# Altium PCB Telemetry_Board.PcbDoc (part 2 of 2)
Units mm, origin at the board's own origin, x right, y up, seen from the top; angles counter-clockwise.
Board outline 50 x 50 mm, 4 copper layers (Top Layer, GND, Power, Bottom Layer), stack 0.603 mm thick; 96 components, 71 nets, 412 pads, 373 vias.
Unrouted connection lines stored in the file: 10.
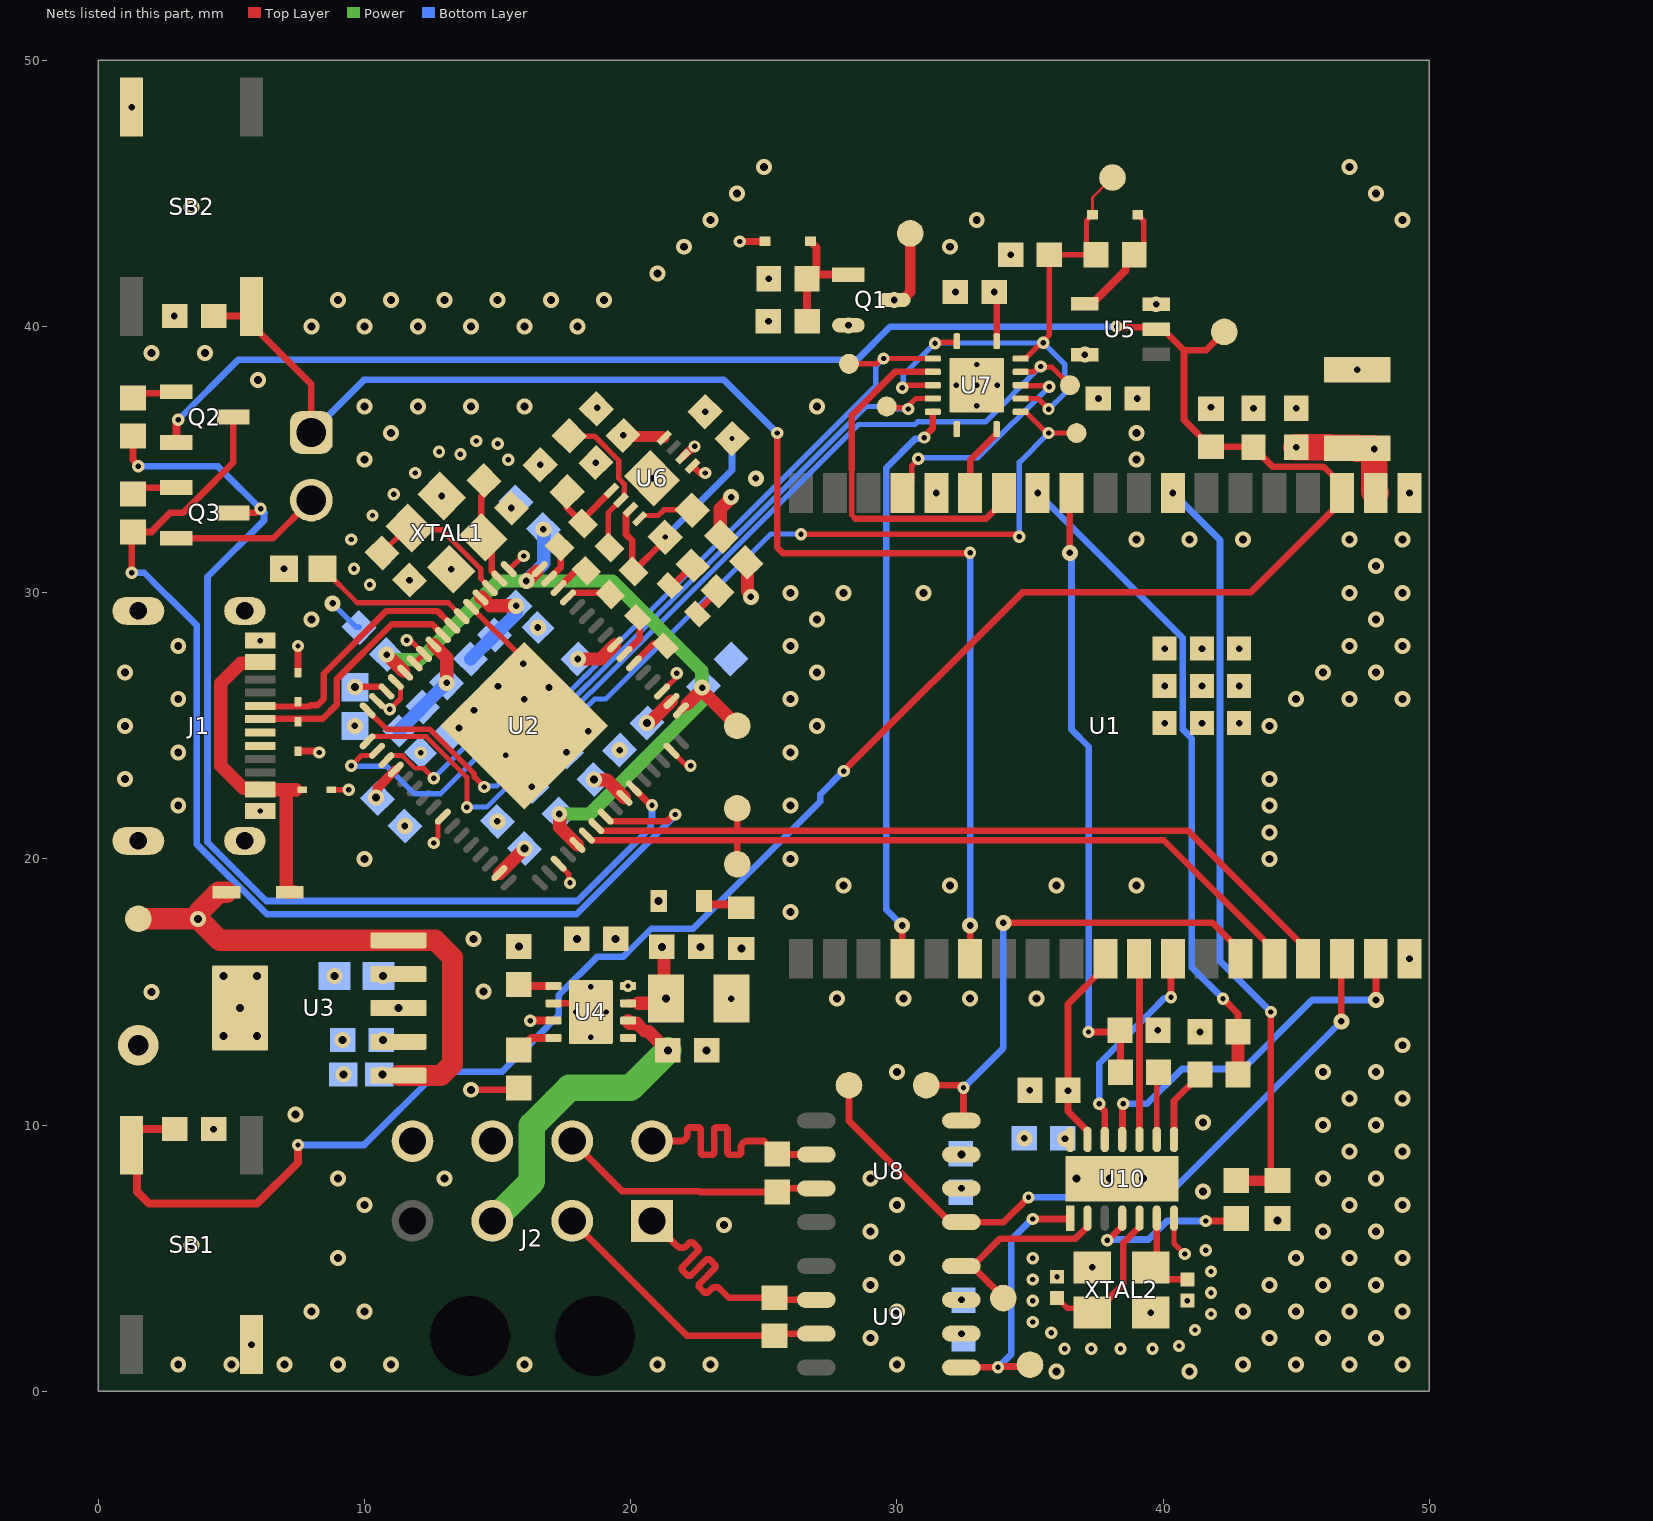
[diagram p4: the nets of this part, all layers, seen from the top]

## Via types
v1: diameter 0.6, hole 0.3, Top Layer to Bottom Layer, tented top, 146 vias
v2: diameter 0.6, hole 0.25, Top Layer to Bottom Layer, 90 vias
v3: diameter 0.46, hole 0.2, Top Layer to Bottom Layer, 88 vias
v4: diameter 0.6, hole 0.3, Top Layer to Bottom Layer, 38 vias
v5: diameter 0.5, hole 0.2, Top Layer to Bottom Layer, 11 vias

## Nets (pads, with @x,y where several pads share a name; then routed paths per layer and width w, separated by ;. In a path a pad name is that pad's centre, name@x,y a point inside that pad or via, vN(x,y) a via of type N, cw(c..) or ccw(c..) an arc to the next point about the centre after c; other vN are vias at no path point)
1V8: C10.1 C11.1 C12.1 C21.1 pad.TP2 U2.12 U2.37 U2.49 U2.64 | length 31.1
  Top Layer w0.322: U2.49@21.887,25.583 U2.49@22.122,25.819
  Top Layer w0.4: U2.12@11.452,27.06 11.515,26.998 U2.12@11.528,26.998
  Top Layer w0.5: v2(10.828,27.672) 10.841,27.672 U2.12@11.452,27.06 ; v2(16.076,30.442) 16.103,30.442 U2.64@16.477,30.816 ; v2(17.314,21.686) 17.333,21.667 17.333,21.192 U2.37@17.998,20.528 ; U2.49@22.122,25.819 v2@22.665,26.362 ; v2(22.684,26.434) 22.703,26.415 22.703,26.297 pad.TP2@24,25
  Power w0.5: v2(10.828,27.672) 10.855,27.672 11.044,27.483 12.067,27.483 15.026,30.442 v2(16.076,30.442) 19.303,30.442 22.672,27.073 22.672,26.446 v2(22.684,26.434) 22.665,26.415 22.665,25.9 18.451,21.686 v2(17.314,21.686)
  Bottom Layer w0.5: v2(16.076,30.442) 16.73,31.096 16.73,32.37 v2(16.714,32.386)
3V3: C1.1 C2.1 C6.1 C7.1 C8.1 C9.1 C13.1 C20.1 C24.1 C25.1 C29.1 C32.1 C33.1 C34.1 FB1.1 FB2.1 Q1.2 R1.2 R6.1 R7.1 R9.2 R10.2 R15.2 R16.2 R17.2 R21.2 R22.2 R23.2 R24.2 R28.2 U1.2 U2.20 U2.31 U2.42 U2.50 U2.56 U4.7 U6.6 U6.8 U8.3 U9.3 U10.14 | length 20.4
  Top Layer w0.3: U6.6@21.968,35.114 22.334,35.481 22.381,35.481 v3(22.4,35.5)
  Top Layer w0.332: U4.7@19.9,14.575 20.288,14.575
  Top Layer w0.35: v4(10.434,22.316) 10.482,22.364 10.482,22.664 U2.20@11.174,23.356 ; U2.31@15.063,19.467 U2.31@15.079,19.467 ; v4@15.998,20.386 v4(16.014,20.386)
  Top Layer w0.4: v2(19.714,35.914) 19.73,35.93 20.022,35.93 20.078,35.874 21.209,35.874 U6.8@21.261,35.821
  Top Layer w0.5: U2.31@15.079,19.467 v4@15.998,20.386 ; v2(18.014,27.514) 18.868,27.514 U2.56@19.412,28.058 ; v4(18.614,22.986) 18.633,22.967 19.094,22.967 U2.42@19.765,22.295 ; 20.288,14.575 21.153,14.575 v4(21.328,14.75) 21.25,14.827 21.25,16.623 v4(21.173,16.7) ; v4(20.614,25.114) 20.633,25.133 20.729,25.133 U2.50@21.533,25.937 ; R9.2@23.406,32.106 23.363,32.148 23.363,33.155 23.773,33.564 v2(23.773,33.591) ; R10.2@24.341,31.141 24.383,31.099 24.383,30.054 24.511,29.926 v2(24.511,29.845)
  Top Layer w0.99: v2(45,35.473) C1.1@46.229,35.473
  Top Layer w1: C1.1@46.229,35.473 46.27,35.473 46.298,35.444 47.278,35.444 C1.1@47.3,35.422 47.918,35.422 v2(47.94,35.4) 47.94,33.8 U1.2@47.99,33.75
  other v2: 32.425,3.435 36.313,9.483 34.997,11.305 41.385,13.5 39.806,13.564 9.636,25 16.507,28.693 16.594,34.806 22.794,36.806 18.748,36.948 41.8,36.975 28.18,40.05 25.173,40.2
  other v3: 12.107,23.993
  other v4: 44.3,6.425 32.425,8.894 24.153,16.635 15.8,16.715
3V3_D: C26.1 C28.1 pad.@30.5,43.5 Q1.3 U5.5 U7.14 | length 4.8
  Top Layer w0.25: v2(33.654,41.3) 33.75,41.204 U7.14@33.75,39.45
  Top Layer w0.381: v2(29.9,41) 30.201,41 30.5,41.299 pad.@30.5,43.5
  other v2: 37.573,37.3 37.06,38.947
\ESP_EN: C27.1 D8.1 pad.@38.1,45.6 R11.1 U7.1 U7.4 U7.10 U7.13 | length 22.4
  Top Layer w0.108: D8.1@37.324,44.2 D8.1@37.349,44.2 37.349,44.661 37.349,44.849 pad.@38.1,45.6
  Top Layer w0.159: D8.1@37.303,44.179 D8.1@37.324,44.2
  Top Layer w0.2: v3(30.2,37.7) 30.27,37.7 30.37,37.8 U7.4@31.35,37.8 ; v3(31.432,39.378) 31.468,39.414 32.23,39.414 32.25,39.434 U7.1@32.25,39.45 ; U7.10@34.65,37.3 35.3,37.3 v3(35.7,36.9) ; U7.13@34.65,38.8 34.67,38.82 34.85,38.82 35.371,39.341 35.45,39.341 v3(35.5,39.391) ; v3@35.5,39.4 35.5,39.461 35.727,39.688 C27.1@35.727,42.7 R11.1@37.485,42.7 37.121,43.064 37.121,43.971 37.246,44.097 37.246,44.122 D8.1@37.303,44.179
  Bottom Layer w0.2: v3(30.2,37.7) 30.243,37.743 30.243,38.189 v3(31.432,39.378) ; v3@31.427,39.374 31.438,39.385 35.485,39.385 35.5,39.4 v3(35.5,39.391) 36.311,38.58 36.311,37.495 35.716,36.9 v3(35.7,36.9)
CAN1_H: J2.6 R19.2 U8.7 | length 10
  Top Layer w0.25: J2.6@17.8,9.4 19.69,7.51 19.88,7.51 21.72,7.51 22.583,7.51 22.608,7.485 R19.2@25.5,7.485 25.64,7.624 U8.7@26.975,7.624
CAN1_L: J2.5 R19.1 U8.6 | length 10
  Top Layer w0.25: J2.5@20.8,9.4 21.75,9.4 21.875,9.4 ccw(c21.875,9.65) 22.125,9.65 22.125,9.832 cw(c22.201,9.832) 22.201,9.908 22.553,9.908 cw(c22.553,9.832) 22.629,9.832 22.629,8.968 ccw(c22.705,8.968) 22.705,8.892 23.057,8.892 ccw(c23.057,8.968) 23.133,8.968 23.133,9.832 cw(c23.209,9.832) 23.209,9.908 23.561,9.908 cw(c23.561,9.832) 23.637,9.832 23.637,8.968 ccw(c23.713,8.968) 23.713,8.892 24.065,8.892 ccw(c24.065,8.968) 24.141,8.968 24.141,9.15 cw(c24.391,9.15) 24.391,9.4 25.002,9.4 25.075,9.327 25.097,9.304 25.486,8.915 R19.1@25.5,8.915 25.521,8.894 U8.6@26.975,8.894
CAN2_H: J2.2 R20.2 U9.7 | length 11
  Top Layer w0.25: J2.2@17.8,6.4 22.115,2.085 R20.2@25.4,2.085 25.48,2.165 U9.7@26.975,2.165
CAN2_L: J2.1 R20.1 U9.6 | length 10.9
  Top Layer w0.25: J2.1@20.8,6.4 21.65,5.55 21.738,5.462 ccw(c21.915,5.638) 22.092,5.462 22.195,5.564 cw(c22.274,5.485) 22.354,5.564 22.513,5.405 cw(c22.433,5.326) 22.513,5.246 21.954,4.687 ccw(c22.033,4.607) 21.954,4.528 22.113,4.369 ccw(c22.192,4.448) 22.272,4.369 22.831,4.928 cw(c22.911,4.849) 22.99,4.928 23.149,4.769 cw(c23.07,4.689) 23.149,4.61 22.59,4.051 ccw(c22.67,3.971) 22.59,3.891 22.749,3.732 ccw(c22.829,3.812) 22.908,3.732 23.011,3.835 cw(c23.188,3.659) 23.365,3.835 23.685,3.515 24.015,3.515 24.915,3.515 R20.1@25.4,3.515 25.48,3.435 U9.6@26.975,3.435
EE_CS: R12.1 R15.1 U6.1 | length 3.1
  Top Layer w0.25: R15.1@17.606,33.794 17.596,33.785 17.596,33.3 17.606,33.291 17.606,33.194 R12.1@18.2,32.6 18.2,32.761 U6.1@19.279,33.839
EE_DATA: R14.1 R17.1 R18.1 U6.3 | length 9
  Top Layer w0.25: U6.3@19.986,33.132 19.824,32.97 19.824,32.742 19.824,32.565 19.824,32.194 20.055,31.963 20.055,30.845 R14.1@20.1,30.8 21.294,31.994 v3(21.294,32.094)
  Bottom Layer w0.25: v3(21.294,32.094) 23.806,34.606 v3(23.806,35.794)
EE_SCK: R13.1 R16.1 U6.2 | length 5.9
  Top Layer w0.2: R16.1@17.694,35.894 17.704,35.885 18.632,35.885 19.55,34.966 19.55,34.292 19.769,34.074 19.769,33.886 19.757,33.875 19.757,33.611 U6.2@19.632,33.486 19.155,33.009 19.155,31.745 R13.1@19.2,31.7
ESP_EN: C3.1 C4.1 pad.@42.3,39.8 Q2.2 R1.1 SB1.2 U1.3 U5.2 | length 113.5
  Top Layer w0.25: v3(28,23.3) 34.715,30.015 43.285,30.015 46.72,33.45 46.72,33.6 U1.3@46.72,33.75 46.72,34.05 46.053,34.717 45.997,34.717 45.992,34.722 45.951,34.722 45.934,34.739 44.111,34.739 43.4,35.45 C3.1@43.4,35.473 43.388,35.485 R1.1@41.8,35.485 41.786,35.485 40.787,36.484 40.787,39.114 ; v3(38.25,40) 38.269,39.981 39.659,39.981 U5.2@39.74,39.9 40,39.9 40.787,39.114 ; pad.@42.3,39.8 41.614,39.114 40.787,39.114
  Top Layer w0.3: C4.1@2.873,9.85 1.632,9.85 1.45,9.668 1.45,7.5 1.9,7.05 5.962,7.05 7.5,8.588 v3(7.5,9.25) ; Q2.2@2.933,35.65 2.933,36.406 3,36.473 v3(3,36.5)
  Bottom Layer w0.25: v3(3,36.5) 5.25,38.75 28.5,38.75 29.75,40 v3(38.25,40) ; v3(7.5,9.25) 9.984,9.25 12.741,12.007 13.719,12.007 14.281,12.007 15.168,12.007 16.477,13.316 17.296,14.135 17.296,14.511 17.296,14.886 17.871,15.461 18.239,15.829 18.731,16.321 19.15,16.321 19.713,16.321 20.111,16.719 20.771,17.379 20.892,17.379 21.454,17.379 22.339,17.379 26.281,21.321 26.679,21.719 27.121,22.16 27.121,22.421 v3(28,23.3)
ESP_IO0_B: BOOT.2 Q3.2 | length 5.7
  Top Layer w0.25: Q3.2@2.933,32.05 6.57,32.05 BOOT.2@8,33.48
EXT_3V3: C22.1 J2.3 U4.6 | length 12.5
  Top Layer w0.461: 20.284,13.764 20.519,13.529 20.655,13.529 20.675,13.509
  Top Layer w0.5: U4.6@19.9,13.925 19.9,13.875 19.95,13.825 20.223,13.825 20.284,13.764 ; 20.675,13.509 21.375,12.809 v4(21.398,12.809)
  Power w1: J2.3@14.8,6.4 16.285,7.885 16.285,8.785 16.285,9.985 17.185,10.885 17.697,11.397 19.986,11.397 v4(21.398,12.809)
FTDI_DTR: Q3.3 R3.2 U2.43 | length 41.6
  Top Layer w0.25: R3.2@1.3,35.885 1.3,34.991 1.5,34.791 v3(1.5,34.75) ; Q3.3@5.067,33 5.915,33 6.07,33.155 v3(6.095,33.155) ; U2.43@20.119,22.649 20.747,22.02 v3(20.8,22.02)
  Bottom Layer w0.25: v3(1.5,34.75) 4.5,34.75 6.25,33 6.221,32.971 6.221,32.721 4.1,30.6 4.1,29.8 4.1,29 4.1,21.332 4.1,20.628 4.898,19.83 6.307,18.421 17.99,18.421 18.329,18.76 20.75,21.181 20.75,21.413 20.8,21.463 v3(20.8,22.02)
FTDI_RTS: Q2.3 R4.2 U2.40 | length 43.1
  Top Layer w0.25: v3(1.25,30.75) 1.25,32.235 R4.2@1.3,32.285 1.999,32.285 2.11,32.395 2.11,32.418 2.235,32.543 2.692,33 3.175,33 3.631,33.457 3.757,33.582 5.067,34.892 Q2.3@5.067,36.6 ; U2.40@19.058,21.588 19.235,21.411 21.362,21.411 21.617,21.667 v3(21.674,21.667)
  Bottom Layer w0.25: v3(1.25,30.75) 1.722,30.75 2.302,30.17 2.8,29.672 3.7,28.772 3.7,20.549 6.329,17.919 7.839,17.919 17.968,17.919 21.674,21.626 v3(21.674,21.667)
FTDI_TCK: pad.@36.5,37.8 U2.16 U7.12 | length 35.3
  Top Layer w0.2: U2.16@10.113,25.583 10.822,24.875 12.438,24.875 14.126,23.188 14.126,23.074 v3(14.5,22.7) ; U7.12@34.65,38.3 35.139,38.3 35.339,38.5 v3(35.4,38.5) 35.419,38.481 35.819,38.481 pad.@36.5,37.8
  Bottom Layer w0.2: v3(14.5,22.7) 14.538,22.738 14.968,22.738 18.512,26.282 18.524,26.282 28.561,36.319 30.673,36.319 30.775,36.421 33.321,36.421 v3(35.4,38.5)
FTDI_TDI: pad.@36.75,36 U2.17 U7.9 | length 37.4
  Top Layer w0.185: U2.17@10.113,24.417 10.29,24.593 12.322,24.593 13.844,23.071 v3(13.844,21.946)
  Top Layer w0.2: v3(26.4,32.2) 34.446,32.2 34.546,32.1 v3(34.6,32.1) ; U7.9@34.65,36.8 34.83,36.8 35.592,36.038 35.662,36.038 v3(35.7,36) 36.5,36 pad.@36.75,36
  Bottom Layer w0.185: v3(13.844,21.946) 14.584,21.946 18.639,26.001 19.05,26.001 25.249,32.2 v3(26.4,32.2)
  Bottom Layer w0.2: v3(34.6,32.1) 34.6,34.9 v3(35.7,36)
FTDI_TDO: pad.@29.617,37 U2.18 U7.5 | length 30.6
  Top Layer w0.2: v3(9.5,23.5) 9.884,23.884 10.288,23.884 U2.18@10.467,24.063 ; pad.@29.617,37 29.665,36.951 30.382,36.951 v3(30.431,36.903) ; v3@30.404,36.995 30.709,37.3 U7.5@31.35,37.3
  Bottom Layer w0.2: v3(9.5,23.5) 9.513,23.487 10.823,23.487 11.835,22.474 11.865,22.444 12.842,22.444 15.368,24.97 16.362,24.97 16.738,25.347 17.168,25.347 18.392,26.571 18.405,26.571 28.833,37 29.912,37 30.009,36.903 v3(30.431,36.903)
FTDI_TMS: pad.@28.2,38.6 U2.19 U7.2 | length 29.3
  Top Layer w0.162: 11.454,23.847 11.892,23.409 12.22,23.409
  Top Layer w0.2: U2.19@10.82,23.71 10.997,23.886 11.414,23.886 11.454,23.847 ; 12.22,23.409 v3(12.6,23.028) ; pad.@28.2,38.6 29.23,38.6 29.43,38.8 v3(29.5,38.8) 31.15,38.8 U7.2@31.35,38.8
  Bottom Layer w0.2: v3(12.6,23.028) 12.6,23.044 14.816,25.259 16.242,25.259 16.619,25.636 17.048,25.636 18.272,26.86 18.285,26.86 18.668,27.243 29.2,37.775 29.2,38.5 v3(29.5,38.8)
GND: C1.2 C2.2 C3.2 C4.2 C5.2 C6.2 C7.2 C8.2 C9.2 C10.2 C11.2 C12.2 C14.2 C15.2 C16.2 C17.2 C18.2 C19.2 C20.2 C21.2 C22.2 C23.2 C24.2 C25.2 C26.2 C27.2 C28.2 C29.2 C30.2 C31.2 C32.2 C33.2 C34.2 C35.2 C36.2 C37.2 D2.1 D3.1 D4.1 D5.2 D6.1 J1.A1_B12 J1.B1_A12 J1.SH1 J1.SH2 J1.SH3 J1.SH4 J2.7 J2.8 pad.3 R2.1 R5.2 R8.1 SB1.3 SB2.3 U1.1 U1.15 U1.38 U1.39 U2.1 U2.5 U2.10 U2.11 U2.13 U2.15 U2.25 U2.35 U2.47 U2.51 U2.65 U3.3 U3.6 U4.2 U4.5 U4.9 U5.3 U6.5 U6.9 U7.7 U7.15 U8.2 U9.2 U10.7 U10.15 XTAL1.2 XTAL1.4 XTAL2.2 XTAL2.4 | length 20.7
  Top Layer w0.089: D2.1@7.5,26.992 D2.1@7.5,27.089 ; D4.1@8.746,22.6 D4.1@8.817,22.6
  Top Layer w0.108: D5.2@24.978,43.2 D5.2@25.049,43.2
  Top Layer w0.185: v3(12.6,20.6) 12.6,20.658 12.765,20.823 12.765,21.411 U2.25@12.942,21.588
  Top Layer w0.2: D4.1@8.818,22.6 v3(9.402,22.6) ; U2.15@10.467,25.937 10.48,25.937 10.754,25.663 10.912,25.663 v3(10.95,25.625) 10.952,25.625 11.351,26.023 11.351,26.467 U2.13@11.174,26.644 ; v3(11.583,28.217) 11.633,28.167 11.772,28.167 U2.10@12.235,27.705 U2.11@11.881,27.351 ; U2.5@14.002,29.472 15.966,27.509 v2(15.966,27.334) ; U2.1@15.417,30.887 15.449,30.887 15.947,31.384 v3(15.98,31.384) ; U2.35@17.29,19.82 17.29,19.807 17.666,19.431 17.666,19.149 v3(17.716,19.099) ; U2.51@21.18,26.29 21.679,26.79 21.679,26.929 v3(21.729,26.979) ; U2.47@21.533,24.063 22.058,23.538 22.212,23.538 v3(22.25,23.5) ; U10.7@40.413,6.505 40.413,5.555 v3(40.813,5.155)
  Top Layer w0.25: D3.1@7.5,24.054 8.206,24.054 8.259,24 v3(8.3,24) ; D2.1@7.5,27.089 v3(7.5,28) ; v1(14,11.328) 15.74,11.328 R5.2@15.8,11.387 ; U4.2@17.1,14.575 17.8,14.575 17.925,14.45 v5(17.925,14.25) ; U6.5@22.326,34.765 22.594,34.497 v3(22.803,34.497) ; v3(24.1,43.2) D5.2@24.978,43.2
  Bottom Layer w0.2: v2(8.8,29.6) 9.7,28.7 C10.2@9.8,28.7
  other v1: 36,0.75 41,0.75 3,1 5,1 7,1 9,1 11,1 16,1 21,1 23,1 30,1 43,1 45,1 47,1 49,1 29,2 44,2 46,2 48,2 8,3 10,3 30,3 43,3 45,3 47,3 49,3 29,4 44,4 46,4 48,4 9,5 30,5 45,5 47,5 49,5 3.5,5.5 29,6 46,6 48,6 23.5,6.25 10,7 30,7 47,7 49,7 41.5,7.5 9,8 13,8 29,8 36.75,8 38,8 39.25,8 46,8 48,8 47,9 49,9 46,10 48,10 41.5,10.1 47,11 49,11 30,12 46,12 48,12 49,13 27.75,14.75 30.25,14.75 32.75,14.75 35.25,14.75 2,15 14.1,17 26,18 28,19 32,19 36,19 39,19 10,20 26,20 44,21 3,22 26,22 1,23 44,23 3,24 26,24 1,25 27,25 44,25 3,26 26,26 45,26 47,26 49,26 1,27 27,27 46,27 48,27 3,28 26,28 47,28 49,28 8,29 27,29 48,29 26,30 28,30 31,30 47,30 49,30 48,31 39,32 41,32 43,32 47,32 49,32 10,35 39,35 11,36 39,36 14,37 27,37 6,38 2,39 4,39 8,40 10,40 12,40 14,40 16,40 18,40 9,41 11,41 13,41 15,41 17,41 19,41 21,42 22,43 32,43 23,44 33,44 49,44 24,45 48,45 25,46 47,46
  other v2: 5.75,1.754 32.425,2.165 39.538,2.955 37.338,4.655 32.425,7.624 34.786,9.505 4.327,9.85 23.779,14.75 49.26,16.25 11.514,21.236 14.986,21.414 16.286,22.714 17.586,24.014 19.586,24.086 18.4,24.8 13.549,24.917 40.06,25.1 41.46,25.1 42.86,25.1 14.114,25.586 16,26 16.928,26.441 15.014,26.486 40.06,26.5 41.46,26.5 42.86,26.5 40.06,27.9 41.46,27.9 42.86,27.9 11.69,30.474 13.258,30.879 6.974,30.9 15.514,33.186 12.904,33.637 31.48,33.75 49.26,33.75 20.8,34.3 24.7,34.3 18.686,34.886 43.4,36.927 45,36.927 39.027,37.3 47.3,38.378 2.848,40.4 39.74,40.84 32.2,41.3 25.185,41.8 34.273,42.7 1.25,48.246
  other v3: 36.3,1.6 37.3,1.6 38.4,1.6 39.6,1.6 40.6,1.7 35.8,2.2 41.2,2.3 35.1,2.6 41.8,2.9 35.1,3.4 40.913,3.405 41.8,3.7 35.1,4.2 36.013,4.305 41.8,4.5 35.1,5 41.6,5.3 15.3,23.9 10.2,30.3 9.6,30.9 9.5,32 10.3,32.9 11.1,33.7 11.9,34.5 15.4,35 13.6,35.2 12.8,35.3 15,35.6 14.2,35.7
  other v4: 7.4,10.4 9.2,11.9 22.852,12.809 9.173,13.2 4.7,13.35 5.95,13.35 5.325,14.4 11.275,14.4 14.475,15.025 4.7,15.6 5.95,15.6 8.874,15.6 22.627,16.7 17.978,17 21.049,18.421 44,20 44,22 10,37 12,37 16,37 3.5,44.5
  other v5: 18.5,13.3 19.075,14.25 18.5,15.2 6.075,21.8 6.075,28.2 33,37.025 32.225,37.8 33,37.8 33.775,37.8 33,38.575
NetC5_1: BOOT.1 C5.1 SB2.2 U1.25 | length 53.2
  Top Layer w0.25: C5.1@4.327,40.4 5.543,40.4 SB2.2@5.75,40.607 ; SB2.2@5.75,40.753 SB2.2@5.75,40.607 ; BOOT.1@8,36.02 8,37.83 5.75,40.08 SB2.2@5.75,40.607 ; v3(25.5,36) 25.5,31.711 25.733,31.478 32.728,31.478 v3(32.75,31.5) ; U1.25@32.75,16.25 v2(32.75,17.5)
  Bottom Layer w0.25: BOOT.1@8,36.02 9.98,38 23.5,38 v3(25.5,36) ; v2(32.75,17.5) v3(32.75,31.5)
NetC13_2: C13.2 D5.1 Q1.1 R2.2 | length 4.7
  Top Layer w0.3: C13.2@26.627,40.2 26.627,41.788 R2.2@26.615,41.8 R2.2@26.765,41.95 ; D5.1@26.751,43.2 26.776,43.2 26.854,43.122 26.854,43.097 26.98,42.971 26.98,42.164 R2.2@26.765,41.95 ; Q1.1@28.18,41.95 R2.2@26.765,41.95
NetC15_1: C15.1 U3.4
  other v4: 10.7,15.6
NetC16_1: C16.1 C18.1 FB1.2 U2.9 | length 4.2
  Top Layer w0.5: U2.9@12.588,28.058 13.086,27.561 v2(13.086,26.614)
  Bottom Layer w0.5: FB1.2@11.293,24.807 11.293,24.814 12.186,25.707 C16.1@12.186,25.714 v2(13.086,26.614)
NetC17_1: C17.1 C19.1 FB2.2 U2.4 | length 4.2
  Top Layer w0.5: U2.4@14.356,29.826 14.407,29.826 14.726,29.507 v2(15.693,29.507)
  Bottom Layer w0.5: C17.1@13.986,27.514 C19.1@14.886,28.414 15.709,29.237 15.709,29.491 v2(15.693,29.507)
NetC30_1: C30.1 U2.2 XTAL1.1 | length 4
  Top Layer w0.25: XTAL1.1@14.46,32.081 14.389,32.152 14.389,33.617 14.502,33.73 14.502,34.198 C30.1@14.486,34.214 ; XTAL1.1@14.714,32.208 14.785,32.138 14.785,30.812 U2.2@15.063,30.533
NetC31_1: C31.1 U2.3 XTAL1.3 | length 5.6
  Top Layer w0.2: C31.1@10.662,31.502 11.595,32.435 XTAL1.3@11.702,32.435 11.773,32.364 12.899,32.364 14.366,30.897 14.366,30.537 14.71,30.193 U2.3@14.71,30.18
NetC35_1: C35.1 U10.5 XTAL2.3 | length 5.9
  Top Layer w0.2: C35.1@36.013,3.505 36.404,3.114 37.179,3.114 XTAL2.3@37.338,2.955
  Top Layer w0.25: XTAL2.3@37.338,2.955 37.438,2.955 38.507,4.024 38.507,5.577 39.113,6.183 U10.5@39.113,6.505
NetC36_1: C36.1 U10.6 XTAL2.1 | length 3.5
  Top Layer w0.25: U10.6@39.763,6.505 39.763,4.88 XTAL2.1@39.538,4.655 39.988,4.205 C36.1@40.913,4.205
NetD6_2: D6.2 R28.1 | length 1.5
  Top Layer w0.3: D6.2@22.751,18.421 22.879,18.293 24.025,18.293 R28.1@24.153,18.165
NetD7_2: D7.2 R10.1 | length 1.2
  Top Layer w0.25: D7.2@22.502,29.202 22.502,29.302 R10.1@23.259,30.059
NetD8_2: D8.2 R11.2 U5.4 | length 4.5
  Top Layer w0.108: D8.2@39.051,44.2 D8.2@39.076,44.2
  Top Layer w0.159: D8.2@39.076,44.2 D8.2@39.097,44.179
  Top Layer w0.2: R11.2@38.915,42.7 39.28,43.064 39.28,43.971 39.154,44.097 39.154,44.122 D8.2@39.097,44.179
  Top Layer w0.3: U5.4@37.06,40.852 37.321,40.852 38.598,42.13 38.598,42.382 R11.2@38.915,42.7
NetD9_2: D9.2 R9.1 | length 1.2
  Top Layer w0.25: D9.2@21.467,30.267 21.567,30.267 R9.1@22.324,31.024
NetQ2_1: Q2.1 R3.1 | length 1.6
  Top Layer w0.25: R3.1@1.4,37.215 1.685,37.5 Q2.1@2.9,37.5
NetQ3_1: Q3.1 R4.1 | length 1.9
  Top Layer w0.25: R4.1@1.2,33.615 R4.1@1.3,33.715 1.535,33.95 Q3.1@2.933,33.95
NetR5_1: R5.1 U4.4 | length 1.5
  Top Layer w0.3: R5.1@15.8,12.818 15.814,12.818 16.27,13.275 U4.4@17.1,13.275
NetR6_2: R6.2 U4.1 | length 1.3
  Top Layer w0.3: R6.2@15.8,15.285 15.86,15.225 U4.1@17.1,15.225
NetR7_2: R7.2 U2.14 | length 1.3
  Top Layer w0.25: v4(9.636,26.451) 9.652,26.467 10.644,26.467 U2.14@10.82,26.29
NetR8_2: R8.2 U2.6 | length 6
  Top Layer w0.2: R8.2@8.426,30.9 8.45,30.9 9.726,29.624 13.144,29.624 U2.6@13.649,29.119
NetR12_2: R12.2 U2.63 | length 1.4
  Top Layer w0.25: U2.63@16.937,30.533 17.375,30.971 17.375,31.685 R12.2@17.33,31.73
NetR13_2: R13.2 U2.62 | length 1.3
  Top Layer w0.25: U2.62@17.29,30.18 17.964,30.853 18.307,30.853 R13.2@18.33,30.83
NetR14_2: R14.2 U2.61 | length 1.7
  Top Layer w0.25: U2.61@17.644,29.826 17.821,30.003 18.814,30.003 18.887,29.93 R14.2@19.23,29.93
NetR18_2: R18.2 U6.4 | length 2.1
  Top Layer w0.2: U6.4@20.339,32.779 20.464,32.904 21.032,32.904 21.244,33.115 22.296,33.115 R18.2@22.306,33.106
NetR21_1: R21.1 R26.1 U1.12 | length 25
  Top Layer w0.25: v3(42.25,14.75) 42.815,14.185 R21.1@42.815,13.5
  Top Layer w0.5: R26.1@42.815,11.9 R21.1@42.815,13.5
  Bottom Layer w0.25: v2(35.29,33.75) 40.739,28.301 40.739,24.861 40.781,24.819 41.079,24.521 41.079,15.921 v3(42.25,14.75)
NetR22_1: R22.1 R27.1 U1.8 | length 29
  Top Layer w0.25: v3(44.05,14.25) 44.05,8.165 R22.1@44.3,7.915
  Top Layer w0.4: R27.1@42.697,7.92 R27.1@42.713,7.905 ; R27.1@42.75,7.915 R22.1@44.3,7.915
  Bottom Layer w0.25: v2(40.37,33.75) 42.139,31.981 42.139,28.181 42.139,27.619 42.139,26.781 42.139,26.219 42.139,25.381 42.139,24.819 42.139,16.161 v3(44.05,14.25)
NetR23_1: R23.1 U1.29 U10.13 | length 7.7
  Top Layer w0.25: U10.13@37.163,9.461 37.163,9.783 36.428,10.517 v2(36.428,11.291) R23.1@36.428,11.305 36.428,14.548 37.83,15.95 U1.29@37.83,16.25
NetR24_1: R24.1 R25.1 U1.11 | length 23.3
  Top Layer w0.25: v2(36.5,31.5) 36.5,33.69 U1.11@36.56,33.75 ; v3(37.2,13.5) 38.362,13.5 38.401,13.538 R25.1@38.401,11.989
  Bottom Layer w0.25: v2(36.5,31.5) 36.56,31.44 36.56,24.86 37.205,24.215 37.205,13.505 v3(37.2,13.5)
NetR25_2: R25.2 U10.9 | length 2.6
  Top Layer w0.2: U10.9@39.763,9.461 39.763,11.92 R25.2@39.831,11.989
NetR26_2: R26.2 U10.8 | length 2.8
  Top Layer w0.25: U10.8@40.413,9.461 40.413,10.915 41.385,11.886 R26.2@41.385,11.9
NetR27_2: R27.2 U10.4 | length 6.3
  Top Layer w0.25: v3(37.906,5.678) 37.941,5.678 38.463,6.2 U10.4@38.463,6.505 ; v3(41.6,6.4) 42.665,6.4 R27.2@42.75,6.485
  Bottom Layer w0.25: v3(37.906,5.678) 37.928,5.7 39.45,5.7 40.15,6.4 v3(41.6,6.4)
NetU1_13: U1.13 U7.3 | length 13.8
  Top Layer w0.192: 28.305,34.617 28.305,32.923 28.442,32.786
  Top Layer w0.25: 28.305,34.617 28.305,36.103 28.305,36.666 29.948,38.309 30.452,38.309 30.559,38.309 30.568,38.3 U7.3@31.35,38.3 ; 28.442,32.786 33.289,32.786 33.356,32.786 34.02,33.45 U1.13@34.02,33.75
NetU1_14: U1.14 U7.8 | length 2.8
  Top Layer w0.25: U1.14@32.75,33.75 32.75,34.98 33.75,35.98 U7.8@33.75,36.15
NetU1_16: U1.16 U7.11 | length 8.7
  Top Layer w0.2: U1.16@30.21,33.75 30.56,34.1 30.56,34.781 30.8,35.021 v3(30.8,35.032) ; U7.11@34.65,37.8 34.67,37.78 35.684,37.78 v3(35.727,37.737)
  Bottom Layer w0.2: v3(30.8,35.032) 30.843,35.075 33.049,35.075 35.711,37.737 v3(35.727,37.737)
NetU1_23: U1.23 U7.6 | length 21.7
  Top Layer w0.25: v2(30.2,17.5) 30.2,16.26 U1.23@30.21,16.25 ; v3(31.03,35.83) 31.03,35.87 31.35,36.191 U7.6@31.35,36.8
  Bottom Layer w0.25: v2(30.2,17.5) 29.6,18.1 29.6,34.694 30.696,35.79 30.99,35.79 v3(31.03,35.83)
NetU1_30: U1.30 U10.10 | length 6.8
  Top Layer w0.25: U1.30@39.1,16.25 39.113,16.237 U10.10@39.113,9.461
NetU1_31: U1.31 U10.12 | length 8.2
  Top Layer w0.25: v3(37.6,10.8) 37.6,10.743 37.813,10.53 U10.12@37.813,9.461 ; v3(40.3,14.8) 40.3,16.18 U1.31@40.37,16.25
  Bottom Layer w0.25: v3(37.6,10.8) 37.6,12.318 39.127,13.845 39.525,14.243 40.053,14.771 40.271,14.771 v3(40.3,14.8)
NetU1_33: pad.@31.1,11.5 U1.33 U8.4 | length 19.7
  Top Layer w0.25: pad.@31.1,11.5 32.359,11.5 32.459,11.4 v3(32.5,11.4) 32.5,10.239 32.02,10.239 U8.4@31.933,10.326 ; v2(34,17.6) 41.86,17.6 42.91,16.55 U1.33@42.91,16.25 U1.33@42.9,16.24
  Bottom Layer w0.25: v3(32.5,11.4) 34,12.9 v2(34,17.6)
NetU1_34: pad.@24,19.8 U1.34 U2.38 | length 28.8
  Top Layer w0.25: U2.38@18.351,20.881 18.528,20.704 24,20.704 ; pad.@24,19.8 24,20.704 ; U1.34@44.18,16.25 44.18,16.55 40.026,20.704 24,20.704
NetU1_35: pad.@24,21.9 U1.35 U2.39 | length 29.8
  Top Layer w0.25: U2.39@18.705,21.235 18.881,21.058 24,21.058 ; pad.@24,21.9 24,21.058 ; U1.35@45.45,16.25 45.45,16.55 40.942,21.058 24,21.058
NetU1_36: pad.@28.2,11.5 U1.36 U8.1 | length 26.9
  Top Layer w0.25: pad.@28.2,11.5 28.2,10.154 32,6.354 34.013,6.354 v3(34.943,7.284) ; v2(46.7,13.9) 46.7,16.23 U1.36@46.72,16.25
  Bottom Layer w0.25: v3(34.943,7.284) 40.084,7.284 v2(46.7,13.9)
NetU1_37: U1.37 U10.11 | length 14
  Top Layer w0.25: U10.11@38.463,9.461 38.475,9.473 38.475,10.775 v3(38.5,10.8) ; U1.37@47.99,16.25 48,16.24 v2(48,14.7)
  Bottom Layer w0.25: v3(38.5,10.8) 39.395,10.8 40.706,12.11 43.011,12.11 45.6,14.7 v2(48,14.7)
RX_CAN: pad.TP4 U9.4 U10.2 | length 7.4
  Top Layer w0.25: U9.4@32.425,4.705 U9.4@32.823,4.705 ; pad.TP4@34,3.5 34,3.528 U9.4@32.823,4.705 ; U10.2@37.163,6.505 37.163,6.183 36.714,5.734 36.053,5.734 35.573,5.734 33.879,5.734 32.85,4.705 U9.4@32.823,4.705
RX_LED: D7.1 U2.54 | length 1.5
  Top Layer w0.25: U2.54@20.119,27.351 20.847,28.079 21.218,28.079 D7.1@21.298,27.998
TX_CAN: pad.TP5 U9.1 U10.1 | length 10.2
  Top Layer w0.25: U9.1@32.425,0.895 32.428,0.897 33.797,0.897 v3(33.8,0.9) 33.829,0.929 34.929,0.929 pad.TP5@35,1 ; v3(35.106,6.471) 36.482,6.471 36.513,6.502 U10.1@36.513,6.505
  Bottom Layer w0.25: v3(33.8,0.9) 34.3,1.4 34.3,5.7 35.071,6.471 v3(35.106,6.471)
TX_LED: D9.1 U2.55 | length 1.6
  Top Layer w0.25: U2.55@19.765,27.705 20.344,28.283 20.344,28.982 D9.1@20.263,29.063
USB_3V3: C23.1 C37.1 U3.2 U4.3 U4.8 | length 0.9
  Top Layer w0.3: v3(16.225,13.925) U4.3@17.1,13.925
  other v3: 19.9,15.225
  other v4: 10.7,13.2 19.432,17
USB_5V: C14.1 D1.C pad.TP1 U3.1 U3.5 | length 19.9
  Top Layer w0.8: pad.TP1@1.5,17.75 v4(3.75,17.75) 4.56,16.94 U3.5@11.275,16.94 12.66,16.94 13.3,16.3 13.3,12.3 12.86,11.86 U3.1@11.275,11.86 ; v4@3.788,18.018 4.52,18.75 D1.C@4.81,18.75
  other v4: 10.677,11.9
USB_D_N: D2.2 J1.A7 J1.B7 U2.7 | length 9.5
  Top Layer w0.24: J1.B7@6.075,25.75 6.098,25.727 7.927,25.727 7.967,25.767 8.228,25.767 8.468,26.008 8.468,26.964 10.819,29.315 12.742,29.315 13.109,28.947 13.111,28.947 13.293,28.765 U2.7@13.295,28.765
USB_D_P: D3.2 J1.A6 J1.B6 U2.8 | length 9.1
  Top Layer w0.24: J1.A6@6.075,25.25 6.098,25.273 8.115,25.273 ; 8.132,25.273 8.432,25.273 8.962,25.803 8.962,26.759 11.024,28.821 12.537,28.821 12.76,28.598 12.76,28.596 12.942,28.414 U2.8@12.942,28.412
USB_VBUS: D1.A D4.2 J1.A4_B9 J1.B4_A9 | length 12.6
  Top Layer w0.089: 7.474,22.379 7.521,22.425 7.521,22.517 7.571,22.517 D4.2@7.654,22.6
  Top Layer w0.5: J1.A4_B9@6.075,27.4 6.025,27.35 5.35,27.35 4.6,26.6 4.6,23.5 5.45,22.65 6.025,22.65 J1.B4_A9@6.075,22.6 7.099,22.6 ; D1.A@7.35,18.77 7.33,18.75 D1.A@7.19,18.75 7.072,18.75 7.052,18.77 7.052,22.553 7.099,22.6 ; 7.432,22.6 7.099,22.6
pads on no net: J1.A5 J1.A8 J1.B5 J1.B8 J2. J2.4 SB1.1 SB1.4 SB2.1 SB2.4 U1.4 U1.5 U1.6 U1.7 U1.9 U1.10 U1.17 U1.18 U1.19 U1.20 U1.21 U1.22 U1.24 U1.26 U1.27 U1.28 U1.32 U2.21 U2.22 U2.23 U2.24 U2.26 U2.27 U2.28 U2.29 U2.30 U2.32 U2.33 U2.34 U2.36 U2.41 U2.44 U2.45 U2.46 U2.48 U2.52 U2.53 U2.57 U2.58 U2.59 U2.60 U5.1 U6.7 U7.15_1 U7.15_2 U7.15_3 U7.15_4 U8.5 U8.8 U9.5 U9.8 U10.3

## Polygon pours and split planes (outlines as drawn)
3V3 on Power "NONET_L01_P-001" (solid, remove dead copper, pour order 51): 0.306,0.306 49.694,0.306 49.694,49.694 0.653,49.694 0.564,49.605
USB_3V3 on Power "NONET_L01_P-001" (solid, pour order 40): 10.075,13.2 10.075,13.6 10.375,13.9 15.55,13.9 19.356,17.706 20.161,17.706 20.161,14.913 20.075,14.827 19.823,14.827 19.45,15.2 19.425,15.2 19.075,15.55 18.431,15.55 15.375,12.494 10.206,12.494 9.9,12.8 9.9,13.2
3V3_D on Power "Power-3V3_D" (solid, pour order 37): 29.04,40.46 29.306,40.194 34.806,40.194 36.75,38.25 36.75,36.5 37,36.25 38,36.25 38.25,36.5 38.25,39.25 35.494,42.006 29.756,42.006 29.04,41.29
GND on GND "NONET_L01_P-001" (solid, pour order 0): 0,0 50,0 50,50 0,50
GND on Bottom Layer "NONET_L01_P-001" (solid, remove dead copper, pour order 2): 0,0 50,0 50,50 0,50
GND on Top Layer "Top_GND" (solid, remove dead copper, pour order 1): 0,0 50,0 50,50 0,50

## Keep-outs
Keep-Out Layer:
  region: 50,17.25 45.4,17.25 45.4,24.75 50,24.75

## Other copper
Power:
  pour cut-out: 36.513,10.405 36.713,10.205 36.713,10.405
  pour cut-out: 26.5,12 26.5,12.718 26.314,12.903 26.311,12.9 25.6,12.9

## Silkscreen, mask and mechanical layers (free items; w line width, h text height)
Top Overlay:
  drawing of 27 lines, arcs and shapes, not listed
  text "Telemetry Module Rev A" at 18.754,47.221 h1.4
  text "TP3" at 29.7,44.45 h0.75
  text "Designed by:" at 8.754,44.087 h1
  text "Issam Akhtar" at 8.754,42.254 h1
  text "TP6" at 21.2,21.5 h0.75
  text "TP7" at 21.1,19.55 h0.75
  text "TP1" at 0.6,16.2 h0.75
  text "GND" at 0.5,11.2 h0.75
  text "TP5" at 33.961,1.891 h0.75
Top Paste:
  region: 40.164,7.558 40.164,8.408 36.764,8.408 36.764,7.558
Mechanical 1:
  the board outline again, w0.254
Top Designator:
  text ".Designator" at 31.12,3.297 h1.52
  text ".Designator" at 38.971,0.14 h1.52 r90
Top Assembly:
  lines w0.2: 35.713,5.527 35.713,10.439 41.213,10.439 41.213,5.527 ; 36.538,5.355 40.338,5.355
  text ".Designator" at 38.463,7.983 h1 r90
Top 3D Body:
  lines w0.2: 36.213,6.483 40.713,6.483 ; 36.213,9.483 40.713,9.483 ; 36.788,2.505 36.788,5.105 40.088,5.105 40.088,2.505 36.788,2.505
Top Courtyard:
  lines w0.2: 35.713,5.527 35.713,10.439 41.213,10.439 41.213,5.527 35.713,5.527 ; 36.538,2.255 36.538,5.355 40.338,5.355 40.338,2.255 36.538,2.255
Top Component Center:
  lines w0.1: 37.963,7.983 38.963,7.983 ; 37.973,3.805 38.903,3.805 ; 38.438,3.34 38.438,4.27 ; 38.463,7.483 38.463,8.483

## Text inside footprints (layer, text, board x,y; h text height)
D2: Top 3D Body "*" at 6.865,26.929 h1.27 r270
D3: Top 3D Body "*" at 8.135,24.117 h1.27 r90
D4: Top 3D Body "*" at 8.683,23.235 h1.27 r180
D5: Top 3D Body "*" at 26.56,43.835 h1.27 r180
D8: Top 3D Body "*" at 37.54,43.565 h1.27
SB1: Top 3D Body "*" at 2.037,2.566 h1.27 r90
SB2: Top Overlay "*" at 6.487,48.818 h0.75 r270; Top 3D Body "*" at 4.963,47.434 h1.27 r270
U5: Top 3D Body "*" at 39.289,39.671 h1.27 r180